# Altium PCB OLED_PCB_Rev1.1.PcbDoc
Units mil, origin at the board's own origin, x right, y up, seen from the top; angles counter-clockwise.
Board outline 1000 x 1000 mil, 2 copper layers (Top Layer, Bottom Layer); 12 components, 13 nets, 54 pads, 1 vias.
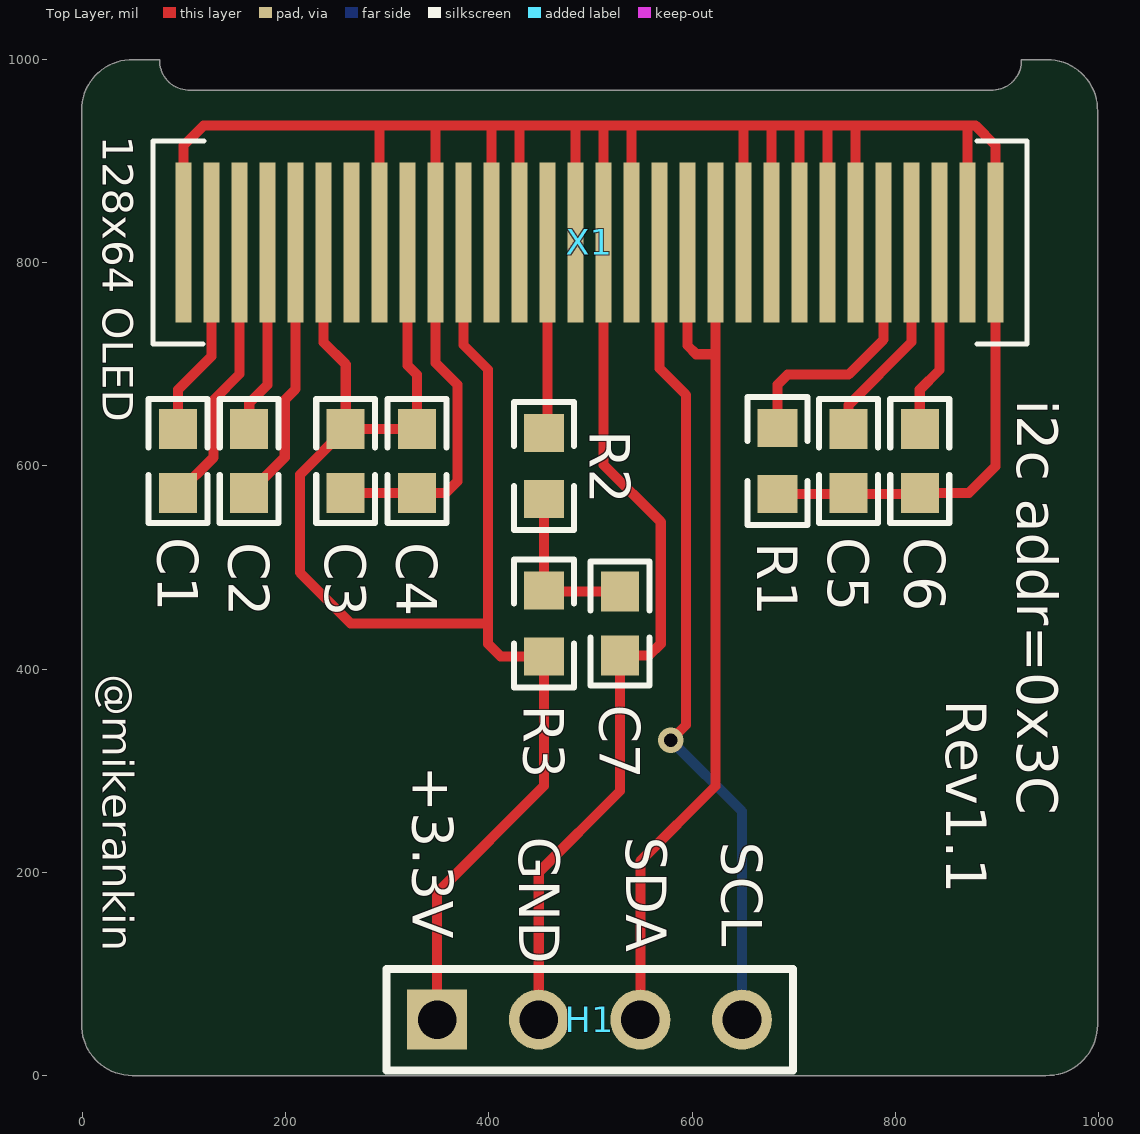
[diagram p0: Top Layer view]
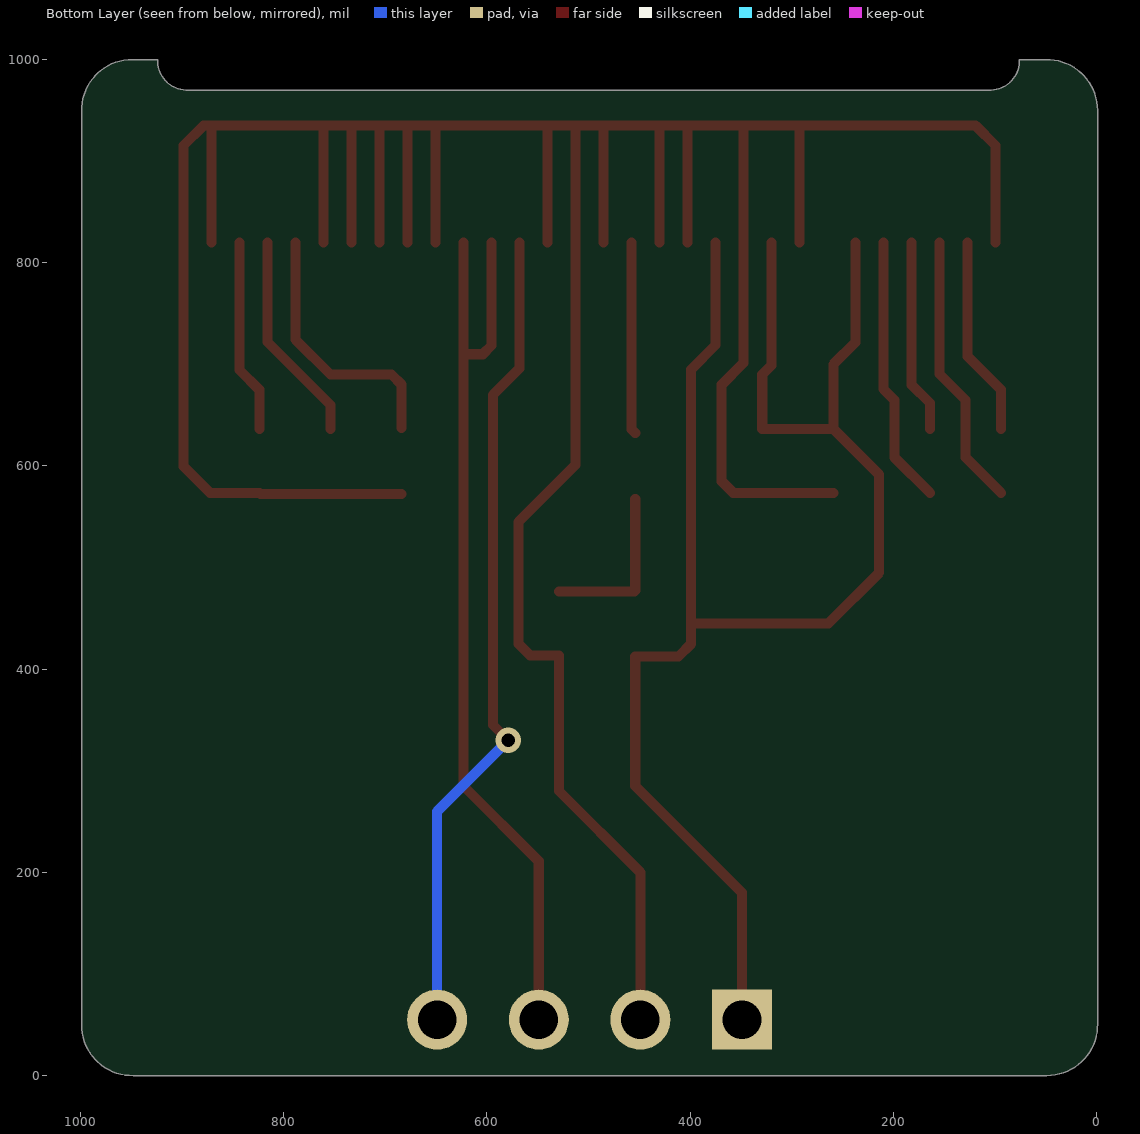
[diagram p1: Bottom Layer view, seen from below]
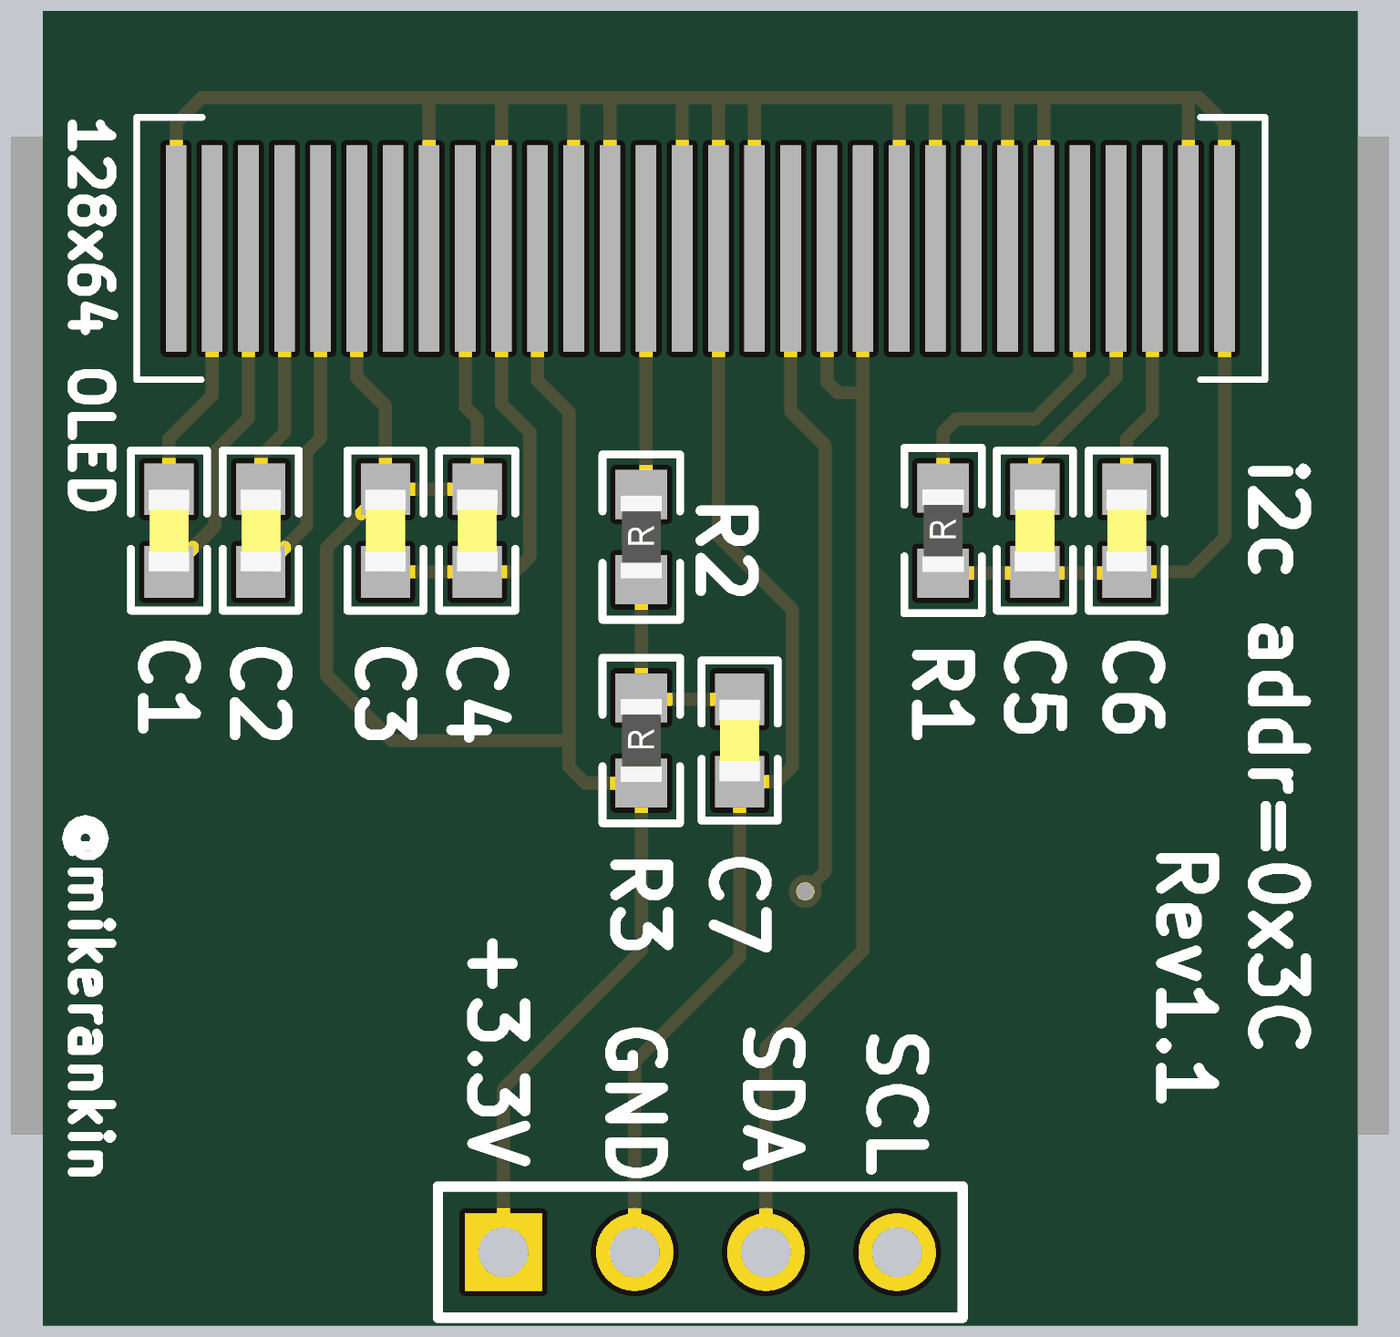
[diagram p2: 3D render of the assembled board from above, using the file's embedded part models]

## Layer stack, top to bottom
Top Layer: signal copper 1.4
Dielectric: dielectric 12.6, FR-4, Dk 4.8
Bottom Layer: signal copper 1.4

## Board outline
-1,51 -1,950 cw(c49,950) 50,999.99 50,1000 75.89,1000 ccw(c104.69,998.8) 103.49,970 896.51,970 ccw(c895.31,998.8) 924.11,1000 949,1000 cw(c949,950) 998.99,949 999,949 999,50 cw(c949,50) 948,0.01 948,0 49,0 cw(c49,50)

## Design rules (kind name [scope] priority, off if disabled: settings)
Clearance [All] p1: gap=10
MinimumSolderMaskSliver [All] p1: minsoldermaskwidth=3
PolygonConnect [All] p1: connectstyle=Relief reliefconductorwidth=10 reliefentries=4 polygonreliefangle="90 Angle" airgapwidth=10
RoutingVias [All] p1: holewidth=28 width=50 viastyle="Through Hole" minholewidth=28 minwidth=50 maxholewidth=28 maxwidth=50
SilkToSilkClearance [All] p1: silktosilkclearance=5
SilkToSolderMaskClearance [IsPad] p1: minsilkscreentomaskgap=5 clearancetoexposedcopper=TRUE
SolderMaskExpansion [All] p1: expansion=4
Width [All] p1: maxlimit=10 minlimit=10 preferedwidth=10
25 further rules are at their usual default settings.

## Components (designator, comment, footprint, x,y, rotation, side; value= is the part's Value field where it differs from the comment)
C1 "1uF" CAPC1608X90N 94,605 r90 top
C2 "1uF" CAPC1608X90N 164,605 r90 top
C3 "1uF" CAPC1608X90N 259,605 r90 top
C4 "1uF" CAPC1608X90N 329,605 r90 top
C5 "4.7uF" CAPC1608X90N 754,605 r90 top
C6 "2.2uF" CAPC1608X90N 824,605 r90 top
C7 "0.1uF" CAPC1608X90N 529,445 r90 top
H1 "CON4" HDR1X4-Empty 499,55 r0 top
R1 "390K" RESC1608X55N 684,605 r90 top
R2 "10K" RESC1608X55N 454,600 r90 top
R3 "10K" RESC1608X55N 454,445 r90 top
X1 "OLED_GLASS" OLED_GLASS 499,820 r0 bottom

## Footprints (in the part's own frame and the unit in brackets; to place one, negate y for a bottom-side part, rotate by r counter-clockwise, add the part's x,y. Pads: shape width x height; smd on the part's side, far side on the other; paste and mask are expansions set on the pad)
CAPC1608X90N [mm] "Chip Capacitor, 2-Leads, Body 1.6x0.8mm, IPC Medium Density (0603)"
  rect 1x0.95 smd: 1(-0.8,0) 2(0.8,0)
  silkscreen extent -1.55,-0.74 1.55,0.74, body extent -0.8,-0.4 0.8,0.4, height 0.79
HDR1X4-Empty [mm]
  rect 1.5x1.5 hole 0.965: 1(-3.81,0)
  round 1.5 hole 0.965: 2(-1.27,0) 3(1.27,0) 4(3.81,0)
  silkscreen extent -5.08,-1.27 5.08,1.27
OLED_GLASS [mm] "OLED_GLASS"
  rect 0.4x4 smd far side: 1(-10.15,0) 2(-9.45,0) 3(-8.75,0) 4(-8.05,0) 5(-7.35,0) 6(-6.65,0) 7(-5.95,0) 8(-5.25,0) 9(-4.55,0) 10(-3.85,0) 11(-3.15,0) 12(-2.45,0) 13(-1.75,0) 14(-1.05,0) 15(-0.35,0) 16(0.35,0) 17(1.05,0) 18(1.75,0) 19(2.45,0) 20(3.15,0) 21(3.85,0) 22(4.55,0) 23(5.25,0) 24(5.95,0) 25(6.65,0) 26(7.35,0) 27(8.05,0) 28(8.75,0) 29(9.45,0) 30(10.15,0)
  body extent -13.33,-4.44 13.34,17.15, height 2.31
RESC1608X55N [mm] "Chip Resistor, 2-Leads, Body 1.6x0.8mm, IPC Medium Density (0603 med)"
  rect 0.95x1 smd: 1(-0.825,0) 2(0.825,0)
  silkscreen extent -1.6,-0.75 1.6,0.75, body extent -0.8,-0.4 0.8,0.4, height 0.54

## Part data
C1 C2 C3 C4 C5 C6 C7: library part CAP_0603, "CAP 0603"
H1: "CONN HEADER 4POS .100\" PADS"
R1 R2 R3: library part RES_0603, "RES 0603"

## Via types
v1: diameter 25, hole 13, Top Layer to Bottom Layer, tented both sides, 1 vias

## Nets (pads, with @x,y where several pads share a name; then routed paths per layer and width w, separated by ;. In a path a pad name is that pad's centre, name@x,y a point inside that pad or via, vN(x,y) a via of type N, cw(c..) or ccw(c..) an arc to the next point about the centre after c; other vN are vias at no path point)
+3.3V: C3.2 C4.2 H1.1 R3.1 X1.6 X1.9 X1.11 | length 1681.8
  Top Layer w10: X1.6 237.19,721.81 259,700 C3.2 ; X1.9 319.87,699.13 329,690 C4.2 C3.2 ; H1.1 349,180 454,285 R3.1 411.48,412.52 399,425 399,445 ; X1.11 374.98,719.02 399,695 399,445 ; C3.2 214,591.5 214,495 264,445 399,445
GND: C3.1 C4.1 C5.1 C6.1 C7.1 H1.2 R1.1 X1.1 X1.8 X1.10 X1.12 X1.13 X1.15 X1.16 X1.17 X1.21 X1.22 X1.23 X1.24 X1.25 X1.29 X1.30 | length 4160.9
  Top Layer w10: X1.1 99.39,915.39 119,935 292.31,935 ; C3.1 C4.1 357.5,573.5 369,585 369,680 347.43,701.57 X1.10 347.43,935 ; X1.8 292.31,935 ; X1.12 402.54,935 ; X1.13 430.1,935 ; H1.2 449,200 529,280 C7.1 557.5,413.5 569,425 569,545 512.78,601.22 X1.16 512.78,935 ; X1.15 485.22,935 ; X1.17 540.34,935 ; X1.21 650.57,935 ; X1.22 678.13,935 ; R1.1 823.02,572.52 C6.1 872.5,573.5 898.61,599.61 X1.30 898.61,915.39 879,935 871.05,935 ; X1.23 705.69,935 ; X1.24 733.25,935 ; X1.25 760.81,935 ; X1.29 871.05,935 ; 292.31,935 347.43,935 ; 347.43,935 402.54,935 ; 402.54,935 430.1,935 ; 430.1,935 485.22,935 ; 485.22,935 512.78,935 ; 512.78,935 540.34,935 ; 540.34,935 650.57,935 ; 650.57,935 678.13,935 ; 678.13,935 705.69,935 ; 705.69,935 733.25,935 ; 733.25,935 760.81,935 ; 760.81,935 871.05,935
NetC1_1: C1.1 X1.3 | length 271.6
  Top Layer w10: C1.1 129,608.5 129,665 154.51,690.51 X1.3
NetC1_2: C1.2 X1.2 | length 197.2
  Top Layer w10: C1.2 94,675 126.95,707.95 X1.2
NetC2_1: C2.1 X1.5 | length 265.4
  Top Layer w10: C2.1 199,608.5 199,665 209.63,675.63 X1.5
NetC2_2: C2.2 X1.4 | length 191
  Top Layer w10: C2.2 164,661.93 182.07,680 X1.4
NetC5_2: C5.2 X1.27 | length 209.2
  Top Layer w10: C5.2 754,660 815.93,721.93 X1.27
NetC6_2: C6.2 X1.28 | length 191.6
  Top Layer w10: C6.2 824,675 843.49,694.49 X1.28
NetC7_2: C7.2 R2.1 R3.2 | length 165.4
  Top Layer w10: R2.1 R3.2 454.98,476.5 C7.2
NetH1_3: H1.3 X1.19 X1.20 | length 928.2
  Top Layer w10: H1.3 549,210.98 623.02,285 623.02,710 ; X1.19 595.46,718.54 604,710 623.02,710 ; X1.20 623.02,710
NetH1_4: H1.4 X1.18 | length 811
  Top Layer w10: X1.18 567.9,696.1 594,670 594,345 v1(579,330)
  Bottom Layer w10: v1(579,330) 649,260 H1.4
NetR1_2: R1.2 X1.26 | length 260.9
  Top Layer w10: R1.2 684,680 694,690 754,690 788.37,724.37 X1.26
NetR2_2: R2.2 X1.14 | length 189
  Top Layer w10: R2.2 457.66,636.14 X1.14
pads on no net: X1.7

## Silkscreen, mask and mechanical layers (free items; w line width, h text height)
Top Overlay:
  text "128x64 OLED" at 20,925 h30 r270
  text "i2c addr=0x3C" at 920,665 h40 r270
  text "@mikerankin" at 20,395 h30 r270
  text "Rev1.1" at 850,370 h40 r270
  text "+3.3V" at 325,305 h40 r270
  text "GND" at 430,235 h40 r270
  text "SDA" at 535,235 h40 r270
  text "SCL" at 629,230 h40 r270
Board_Outline:
  the board outline again, w10